# EAGLE board 2VersionsPanelized (EAGLE 6.5.0)
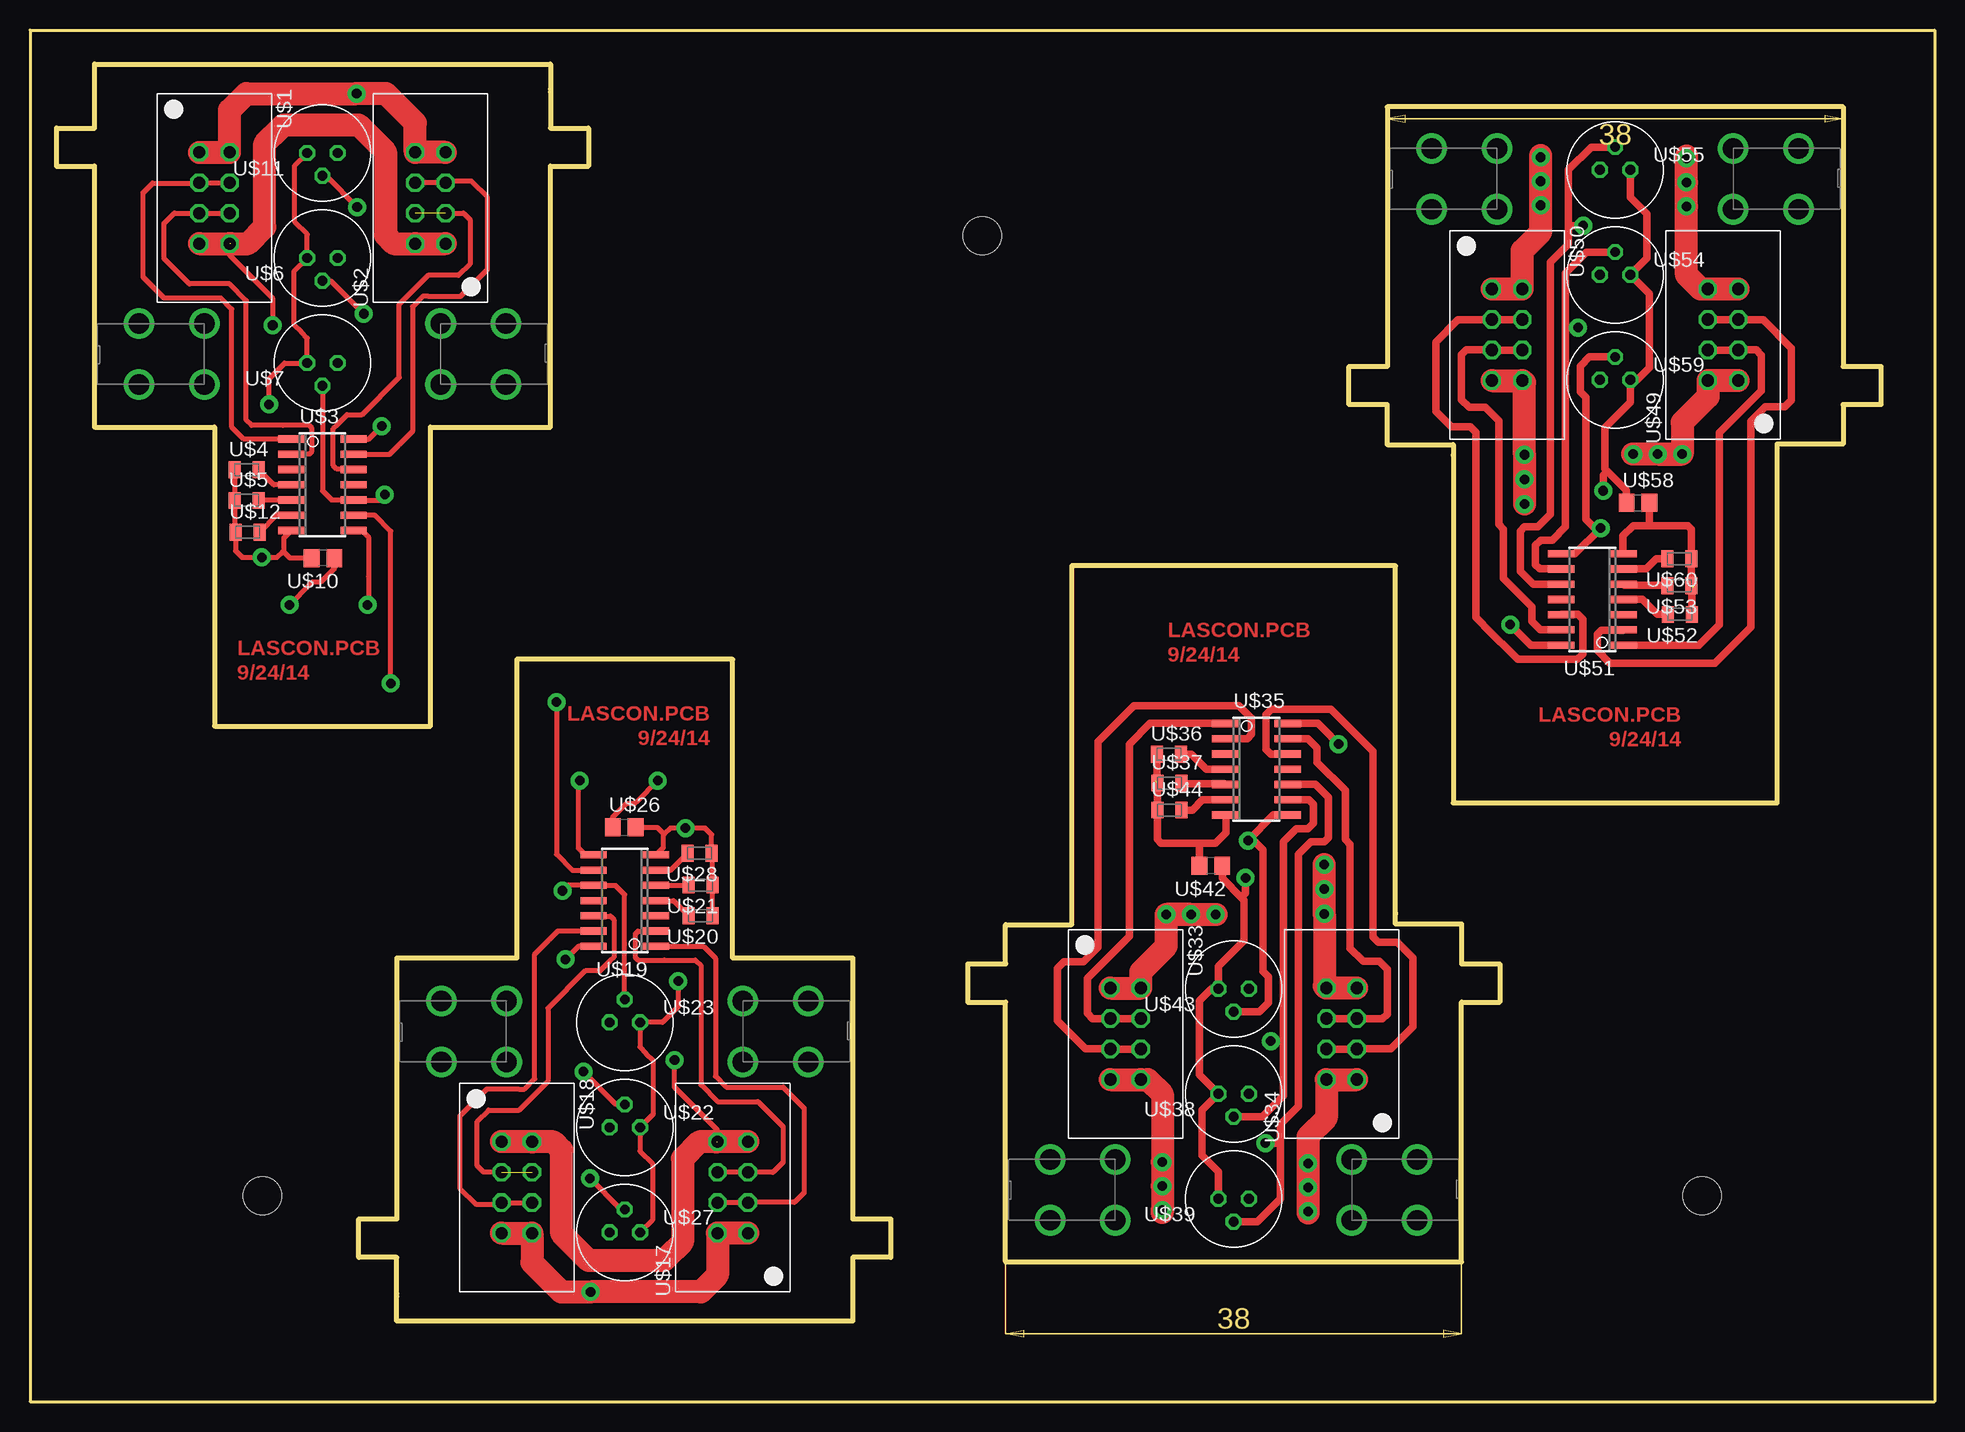
[diagram p0: board, top side]
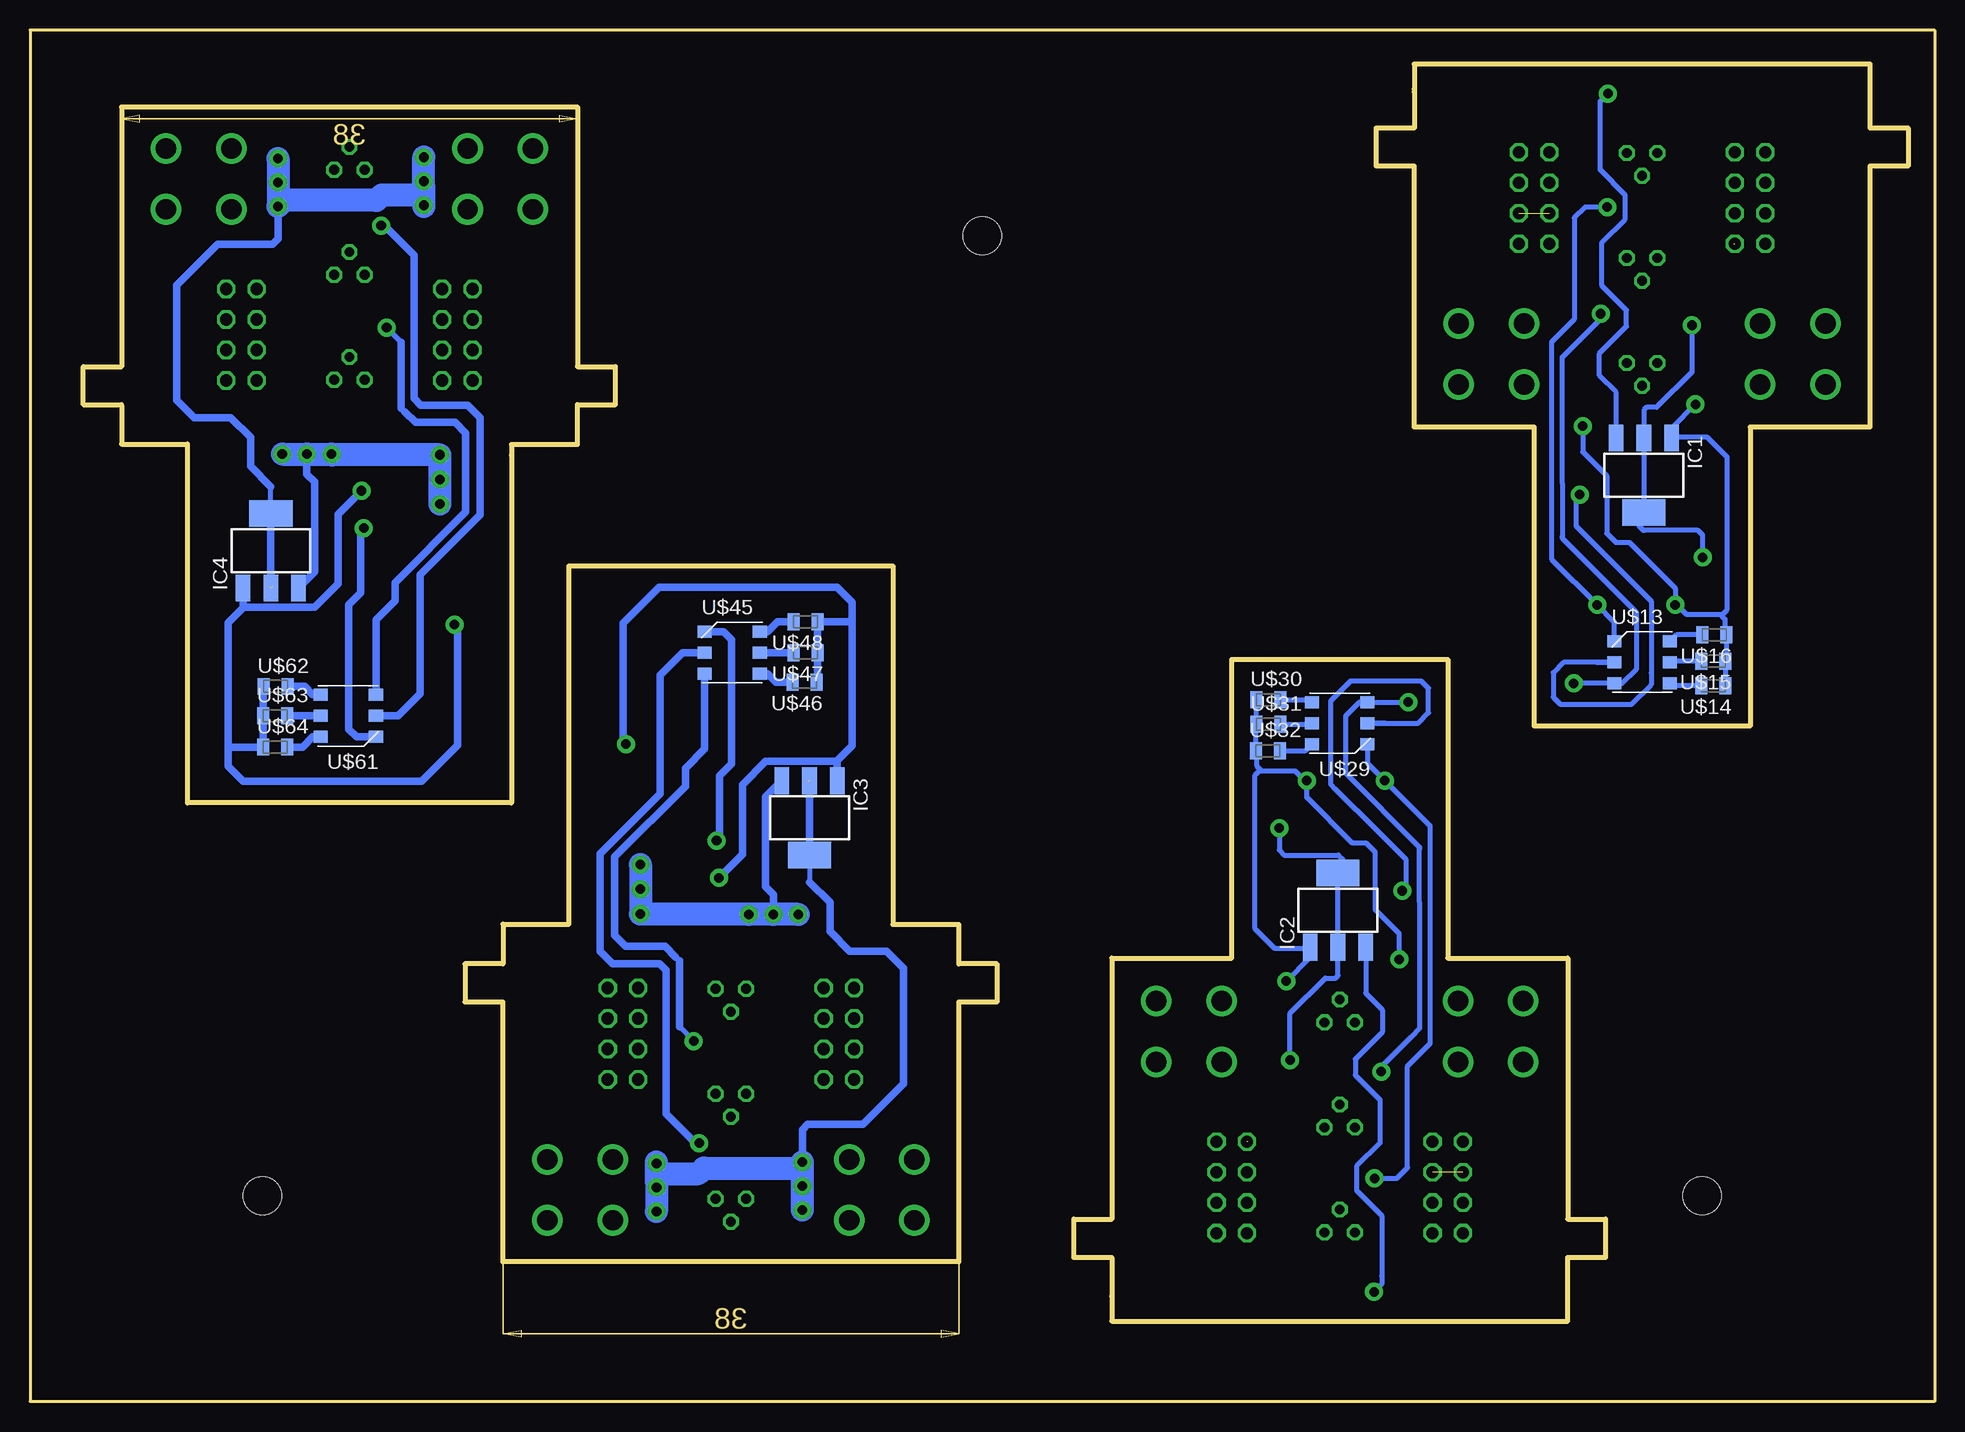
[diagram p1: board, bottom side, seen from below]

Size 158.75 x 114.3 mm. Coordinates in mm from the lower left corner, seen from the top.
Outline: 0,114.3 158.75,114.3 158.75,0 0,0 0,114.3
Copper layers (1*16): Top 0.0356mm / dielectric 1.5011mm / Bottom 0.0356mm
Design rules "SilverCircuits *": minimum track width 7mil, minimum drill 14mil, track to track 7mil, track to pad 7mil, pad to pad 7mil, via to via 7mil, smd to smd 0mil, copper to edge 20mil, drill to drill 8mil, minimum pad ring 10mil, minimum via ring 8mil, stop-mask expansion 4mil, vias tented up to drill 0mil, thermal gap 10mil
Holes 3.17 mm at 79.38,97.15 139.38,17.15 19.38,17.15
Milling: 74 lines

## Footprints (pad centres in the part's own frame; a part is rotated, then mirrored left to right if it is on the bottom)
SOT223 = smd 1.219 x 2.235: 1 -2.311,-3.099; 2 0,-3.099; 3 2.311,-3.099 | smd 3.6 x 2.2: 4 0,3.099
2X04 = drill 1.016 octagon: 1 -3.81,-1.27; 2 -3.81,1.27; 3 -1.27,-1.27; 4 -1.27,1.27; 5 1.27,-1.27; 6 1.27,1.27; 7 3.81,-1.27; 8 3.81,1.27
SO14 = smd 0.6 x 2.2: 1 -3.81,-2.6; 2 -2.54,-2.6; 3 -1.27,-2.6; 4 0,-2.6; 5 1.27,-2.6; 6 2.54,-2.6; 7 3.81,-2.6; 8 3.81,2.6; 9 2.54,2.6; 10 1.27,2.6; 11 0,2.6; 12 -1.27,2.6; 13 -2.54,2.6; 14 -3.81,2.6
RF-C0805 = smd 1 x 1.4: 1 -1,0; 2 1,0
LASER = drill 0.813 octagon: 1 1.27,0; 2 0,1.905; 3 -1.27,0
90DEGMNT = drill 1.7: P$1 -2.72,2.54; P$2 2.72,2.54; P$3 -2.72,-2.54; P$4 2.72,-2.54
C0805 = smd 1.3 x 1.5: 1 -0.95,0; 2 0.95,0
PLCC-6 = smd 1.18 x 1: 1 -2.31,1.75; 2 -2.31,0; 3 -2.31,-1.75; 4 2.31,-1.75; 5 2.31,0; 6 2.31,1.75

## Placement (x,y rotation side)
IC1  [SOT223]  24.23,77.2 180 bottom
IC2  [SOT223]  49.73,40.95 0 bottom
IC3  [SOT223]  93.78,48.65 180 bottom
IC4  [SOT223]  138.68,70.9 0 bottom
U$1  2X4IDC  [2X04]  15.38,100.3 270 top
U$2  2X4IDC  [2X04]  33.38,100.3 90 top
U$3  WS2801  [SO14]  24.38,76.4 270 top
U$4  24  [RF-C0805]  18.08,77.65 0 top
U$5  24  [RF-C0805]  18.08,75.1 0 top
U$6  LASER  [LASER]  24.38,95.3 180 top
U$7  LASER  [LASER]  24.38,86.55 180 top
U$8  90DEGMNT  [90DEGMNT]  11.81,87.3 0 top
U$9  90DEGMNT  [90DEGMNT]  36.95,87.3 180 top
U$10  [C0805]  24.42,70.3 180 top
U$11  LASER  [LASER]  24.38,104.05 180 top
U$12  24  [RF-C0805]  18.12,72.45 0 top
U$13  LED5060A  [PLCC-6]  24.38,61.6 0 bottom
U$14  24  [RF-C0805]  18.42,59.65 180 bottom
U$15  24  [RF-C0805]  18.42,61.7 180 bottom
U$16  24  [RF-C0805]  18.38,63.9 180 bottom
U$17  2X4IDC  [2X04]  58.58,17.85 90 top
U$18  2X4IDC  [2X04]  40.58,17.85 270 top
U$19  WS2801  [SO14]  49.58,41.75 90 top
U$20  24  [RF-C0805]  55.88,40.5 180 top
U$21  24  [RF-C0805]  55.88,43.05 180 top
U$22  LASER  [LASER]  49.58,22.85 0 top
U$23  LASER  [LASER]  49.58,31.6 0 top
U$24  90DEGMNT  [90DEGMNT]  62.14,30.85 180 top
U$25  90DEGMNT  [90DEGMNT]  37.01,30.85 0 top
U$26  [C0805]  49.52,47.85 0 top
U$27  LASER  [LASER]  49.58,14.1 0 top
U$28  24  [RF-C0805]  55.83,45.7 180 top
U$29  LED5060A  [PLCC-6]  49.58,56.55 180 bottom
U$30  24  [RF-C0805]  55.52,58.5 0 bottom
U$31  24  [RF-C0805]  55.52,56.45 0 bottom
U$32  24  [RF-C0805]  55.58,54.25 0 bottom
U$33  2X4IDC  [2X04]  91.33,30.65 270 top
U$34  2X4IDC  [2X04]  109.33,30.65 90 top
U$35  WS2801  [SO14]  102.22,52.7 270 top
U$36  24  [RF-C0805]  94.92,53.95 0 top
U$37  24  [RF-C0805]  94.97,51.55 0 top
U$38  LASER  [LASER]  100.33,25.65 180 top
U$39  LASER  [LASER]  100.33,16.9 180 top
U$40  90DEGMNT  [90DEGMNT]  87.75,17.65 0 top
U$41  90DEGMNT  [90DEGMNT]  112.9,17.65 180 top
U$42  [C0805]  98.42,44.65 180 top
U$43  LASER  [LASER]  100.33,34.4 180 top
U$44  24  [RF-C0805]  94.97,49.3 0 top
U$45  LED5060A  [PLCC-6]  100.22,62.4 0 bottom
U$46  24  [RF-C0805]  94.17,59.95 180 bottom
U$47  24  [RF-C0805]  94.12,62.4 180 bottom
U$48  24  [RF-C0805]  94.12,65 180 bottom
U$49  2X4IDC  [2X04]  141.12,88.9 90 top
U$50  2X4IDC  [2X04]  123.12,88.9 270 top
U$51  WS2801  [SO14]  130.22,66.85 90 top
U$52  24  [RF-C0805]  137.53,65.6 180 top
U$53  24  [RF-C0805]  137.47,68 180 top
U$54  LASER  [LASER]  132.12,93.9 0 top
U$55  LASER  [LASER]  132.12,102.65 0 top
U$56  90DEGMNT  [90DEGMNT]  144.69,101.9 180 top
U$57  90DEGMNT  [90DEGMNT]  119.56,101.9 0 top
U$58  [C0805]  134.03,74.9 0 top
U$59  LASER  [LASER]  132.12,85.15 0 top
U$60  24  [RF-C0805]  137.47,70.25 180 top
U$61  LED5060A  [PLCC-6]  132.22,57.15 180 bottom
U$62  24  [RF-C0805]  138.28,59.6 0 bottom
U$63  24  [RF-C0805]  138.32,57.15 0 bottom
U$64  24  [RF-C0805]  138.32,54.55 0 bottom

## Library data of the parts
IC1-IC4 = microchip; MPN: MCP1804T-3302I
U$1 U$2 U$17 U$18 U$33 U$34 U$49 U$50 = GW-devices; MPN: 75869-132LF
U$3-U$12 U$14-U$16 U$19-U$28 U$30-U$32 U$35-U$44 U$46-U$48 U$51-U$60 U$62-U$64 = GW-devices
U$13 U$29 U$45 U$61 = GW-devices; PRICE: 0.25

## Nets
+3V1: IC2.1 U$19.14 U$22.1 U$23.1 U$26.1 U$27.1 U$30.1 U$31.1 U$32.1
+3V2: IC3.1 U$35.14 U$38.1 U$39.1 U$42.1 U$43.1 U$46.1 U$47.1 U$48.1
+3V3: IC1.1 U$3.14 U$6.1 U$7.1 U$10.1 U$11.1 U$14.1 U$15.1 U$16.1
+3V4: IC4.1 U$51.14 U$54.1 U$55.1 U$58.1 U$59.1 U$62.1 U$63.1 U$64.1
GND: IC1.2 IC1.4 U$1.7 U$1.8 U$2.1 U$2.2 U$3.7 U$4.1 U$5.1 U$10.2 U$12.1
GND1: IC2.2 IC2.4 U$17.7 U$17.8 U$18.1 U$18.2 U$19.7 U$20.1 U$21.1 U$26.2 U$28.1
GND2: IC3.2 IC3.4 U$33.7 U$33.8 U$34.1 U$34.2 U$35.7 U$36.1 U$37.1 U$42.2 U$44.1
GND3: IC4.2 IC4.4 U$49.7 U$49.8 U$50.1 U$50.2 U$51.7 U$52.1 U$53.1 U$58.2 U$60.1
N$1: IC1.3 U$1.1 U$1.2 U$2.7 U$2.8
N$2: U$3.9 U$6.2 U$13.3
N$3: U$3.10 U$7.2 U$13.2
N$4: U$3.8 U$11.2 U$13.1
N$5: U$1.3 U$1.4 U$3.1
N$6: U$1.5 U$1.6 U$3.2
N$7: U$2.5 U$2.6 U$3.13
N$8: U$2.3 U$2.4 U$3.12
N$9: U$3.4 U$4.2
N$10: U$3.5 U$5.2
N$11: U$3.6 U$12.2
N$12: U$13.4 U$14.2
N$13: U$13.5 U$15.2
N$14: U$13.6 U$16.2
N$15: IC2.3 U$17.1 U$17.2 U$18.7 U$18.8
N$16: U$17.3 U$17.4 U$19.1
N$17: U$17.5 U$17.6 U$19.2
N$18: U$18.5 U$18.6 U$19.13
N$19: U$18.3 U$18.4 U$19.12
N$20: U$19.4 U$20.2
N$21: U$19.5 U$21.2
N$22: U$19.10 U$23.2 U$29.2
N$23: U$19.9 U$22.2 U$29.3
N$24: U$19.8 U$27.2 U$29.1
N$25: U$19.6 U$28.2
N$26: U$29.4 U$30.2
N$27: U$29.5 U$31.2
N$28: U$29.6 U$32.2
N$29: IC3.3 U$33.1 U$33.2 U$34.7 U$34.8
N$30: U$33.3 U$33.4 U$35.1
N$31: U$33.5 U$33.6 U$35.2
N$32: U$34.5 U$34.6 U$35.13
N$33: U$34.3 U$34.4 U$35.12
N$34: U$35.4 U$36.2
N$35: U$35.5 U$37.2
N$36: U$35.10 U$39.2 U$45.2
N$37: U$35.9 U$38.2 U$45.3
N$38: U$35.8 U$43.2 U$45.1
N$39: U$35.6 U$44.2
N$40: U$45.4 U$46.2
N$41: U$45.5 U$47.2
N$42: U$45.6 U$48.2
N$43: IC4.3 U$49.1 U$49.2 U$50.7 U$50.8
N$44: U$49.3 U$49.4 U$51.1
N$45: U$49.5 U$49.6 U$51.2
N$46: U$50.5 U$50.6 U$51.13
N$47: U$50.3 U$50.4 U$51.12
N$48: U$51.4 U$52.2
N$49: U$51.5 U$53.2
N$50: U$51.10 U$55.2 U$61.2
N$51: U$51.9 U$54.2 U$61.3
N$52: U$51.8 U$59.2 U$61.1
N$53: U$51.6 U$60.2
N$54: U$61.4 U$62.2
N$55: U$61.5 U$63.2
N$56: U$61.6 U$64.2

## Tracks (layer width: path | path; a pad name or v marks a point on that pad's centre or on a via)
+3V1  (via drill 0.8 pad 1.5)
  Top 0.406: U$27.1 51.88,15.13 51.88,19.85 50.84,20.88 U$22.1 51.92,23.93 51.92,28.45 51.33,29.05 50.84,29.53 U$23.1 52.73,31.6 54.02,32.9 v54.02,35.05 | v52.33,51.75 50.62,50.05 50.42,49.85 49.73,49.85 48.58,48.7 U$26.1 | U$19.14 45.72,37.94 v44.62,36.85
  Bottom 0.406: U$30.1 U$31.1 56.58,56.4 U$32.1 56.48,54.15 56.48,52.95 56.17,52.65 | 56.17,52.65 56.08,52.55 53.27,52.55 52.48,51.75 v52.33,51.75 52.33,50.35 48.52,46.55 47.48,46.55 47.38,46.55 47.33,46.5 46.62,45.8 46.62,41 44.62,39 v44.62,36.85 | 56.17,52.65 56.67,52.15 56.67,39.45 55.02,37.8 52.09,37.8 | 52.09,37.8 IC2.1 | 52.09,37.8 52.09,36.99 v54.02,35.05
+3V2  (via drill 0.8 pad 1.5)
  Top 0.406: 101.17,41.75 101.17,41.8
  Top 0.61: U$39.1 99.06,19.17 97.67,20.55 97.67,24.27 U$38.1 97.47,27.23 97.47,33.4 98.47,34.4 U$43.1 99.06,36.28 101.17,38.4 101.17,41.75 | v109.08,54.8 107.86,56.01 107.36,56.51 U$35.14 | 101.17,41.8 100.97,42 | 100.97,42 99.38,43.6 U$42.1 | v101.33,43.65 101.33,42.35 100.97,42
  Bottom 0.406: IC3.1 91.46,53.41 | 93.12,60 U$46.1 | 90.33,65 90.22,64.9 | 97.17,53.35 97.42,53.35
  Bottom 0.61: 91.46,53.41 90.22,54.65 90.22,64.9 90.22,66.6 91.47,67.85 106.33,67.85 109.33,64.85 109.33,55.05 v109.08,54.8 | 93.12,60 U$47.1 U$48.1 90.33,65 | IC3.1 91.46,53.35 92.38,53.35 97.17,53.35 | 97.42,53.35 99.38,51.4 99.38,45.65 99.38,45.6 v101.33,43.65
+3V3  (via drill 0.8 pad 1.5)
  Top 0.406: U$11.1 22.08,103.02 22.08,98.3 23.1,97.27 U$6.1 22.02,94.22 22.02,89.7 22.62,89.1 23.1,88.62 U$7.1 21.23,86.55 19.92,85.25 v19.92,83.1 | v21.62,66.4 23.33,68.1 23.52,68.3 24.23,68.3 25.38,69.45 U$10.1 | U$3.14 28.23,80.21 v29.33,81.3
  Bottom 0.406: U$14.1 U$15.1 17.38,61.75 U$16.1 17.48,64 17.48,65.2 17.77,65.5 | 17.77,65.5 17.88,65.6 20.67,65.6 21.48,66.4 v21.62,66.4 21.62,67.8 25.42,71.6 26.48,71.6 26.58,71.6 26.62,71.65 27.33,72.35 27.33,77.15 29.33,79.15 v29.33,81.3 | 17.77,65.5 17.27,66 17.27,78.7 18.92,80.35 21.86,80.35 | 21.86,80.35 IC1.1 | 21.86,80.35 21.86,81.16 v19.92,83.1
+3V4  (via drill 0.8 pad 1.5)
  Top 0.406: 131.28,77.8 131.28,77.75
  Top 0.61: U$55.1 133.4,100.38 134.78,99 134.78,95.28 U$54.1 134.97,92.32 134.97,86.15 133.97,85.15 U$59.1 133.4,83.27 131.28,81.15 131.28,77.8 | v123.38,64.75 124.59,63.54 125.09,63.04 U$51.14 | 131.28,77.75 131.47,77.55 | 131.47,77.55 133.07,75.95 U$58.1 | v131.12,75.9 131.12,77.2 131.47,77.55
  Bottom 0.406: IC4.1 140.99,66.14 | 139.32,59.55 U$62.1 | 142.12,54.55 142.22,54.65 | 135.28,66.2 135.03,66.2
  Bottom 0.61: 140.99,66.14 142.22,64.9 142.22,54.65 142.22,52.95 140.97,51.7 126.12,51.7 123.12,54.7 123.12,64.5 v123.38,64.75 | 139.32,59.55 U$63.1 U$64.1 142.12,54.55 | IC4.1 140.99,66.2 140.07,66.2 135.28,66.2 | 135.03,66.2 133.07,68.15 133.07,73.9 133.07,73.95 v131.12,75.9
GND  (via drill 0.8 pad 1.5)  (1 unrouted)
  Top 0.406: U$4.1 U$5.1 17.08,72.5 U$12.1 17.12,70.9 17.67,70.35 v19.33,70.35 20.58,70.35 21.1,70.88 | 21.1,70.88 21.17,70.95 21.17,71.99 U$3.7 | U$10.2 21.67,70.3 21.1,70.88 | U$1.8 16.65,95.53 20.23,91.95 v20.23,89.7
  Top 1.93: U$1.7 U$1.8 | 16.73,96.5 18.17,96.5 19.58,97.9 19.58,104.85 20.88,106.15 21.12,106.4 27.38,106.4 29.62,104.15 29.62,97.2 30.33,96.5 U$2.2 U$2.1
  Bottom 0.406: v20.23,89.7 20.23,85.8 23.17,82.85 24.02,82.85 24.23,82.65 IC1.2 IC1.4 24.62,73.7 24.62,72.95 24.27,72.6 24.23,72.6 19.73,72.6 19.33,72.2 v19.33,70.35
GND1  (via drill 0.8 pad 1.5)  (1 unrouted)
  Top 0.406: U$20.1 U$21.1 56.88,45.65 U$28.1 56.83,47.25 56.27,47.8 v54.62,47.8 53.38,47.8 52.85,47.27 | 52.85,47.27 52.77,47.2 52.77,46.16 U$19.7 | U$26.2 52.27,47.85 52.85,47.27 | U$17.8 57.3,22.62 53.73,26.2 v53.73,28.45
  Top 1.93: U$17.7 U$17.8 | 57.22,21.65 55.77,21.65 54.38,20.25 54.38,13.3 53.08,12 52.83,11.75 46.58,11.75 44.33,14 44.33,20.95 43.62,21.65 U$18.2 U$18.1
  Bottom 0.406: v53.73,28.45 53.73,32.35 50.77,35.3 49.92,35.3 49.73,35.5 IC2.2 IC2.4 49.33,44.45 49.33,45.2 49.67,45.55 49.73,45.55 54.23,45.55 54.62,45.95 v54.62,47.8
GND2  (via drill 0.8 pad 1.5)  (1 unrouted)
  Top 0.406: 93.92,51.6 U$37.1
  Top 0.61: U$36.1 93.92,51.6 | U$37.1 U$44.1 93.97,46.85 94.28,46.55 97.47,46.55 | 97.47,46.55 98.83,46.55 99.67,47.4 99.67,48.84 U$35.7 | U$42.2 97.47,46.55
  Top 1.93: U$33.7 U$33.8 93.19,26.84 94.38,25.65 v94.38,19.95 v94.38,17.95 v94.38,15.95 94.38,15.75 | U$34.1 U$34.2 108.06,23.63 106.53,22.1 v106.53,19.85 v106.53,17.85 v106.53,15.85 106.53,15.7
  Bottom 0.406: IC3.4 93.78,43.3
  Bottom 0.61: IC3.2 IC3.4 | 93.78,43.3 92.08,41.6 92.08,39.2 90.42,37.55 87.38,37.55 85.92,36.1 85.92,26.5 89.33,23.1 93.92,23.1 94.38,22.65 v94.38,19.95
  Bottom 1.93: v94.38,15.95 94.38,19.9 | v106.53,15.85 106.53,18.35 106.53,18.7 | 106.53,18.7 106.53,19.95 106.53,18.7 | 106.53,18.7 106.22,19 103.17,19 103.03,19 102.58,19.45 94.88,19.45 v94.38,19.95
GND3  (via drill 0.8 pad 1.5)  (1 unrouted)
  Top 0.406: 138.53,67.95 U$53.1
  Top 0.61: U$52.1 138.53,67.95 | U$53.1 U$60.1 138.47,72.7 138.18,73 134.97,73 | 134.97,73 133.62,73 132.78,72.15 132.78,70.71 U$51.7 | U$58.2 134.97,73
  Top 1.93: U$49.7 U$49.8 139.26,92.71 138.07,93.9 v138.07,99.6 v138.07,101.6 v138.07,103.6 138.07,103.8 | U$50.1 U$50.2 124.4,95.92 125.92,97.45 v125.92,99.7 v125.92,101.7 v125.92,103.7 125.92,103.85
  Bottom 0.406: IC4.4 138.68,76.25
  Bottom 0.61: IC4.2 IC4.4 | 138.68,76.25 140.38,77.95 140.38,80.35 142.03,82 145.07,82 146.53,83.45 146.53,93.05 143.12,96.45 138.53,96.45 138.07,96.9 v138.07,99.6
  Bottom 1.93: v138.07,103.6 138.07,99.65 | v125.92,103.7 125.92,101.2 125.92,100.85 | 125.92,100.85 125.92,99.6 125.92,100.85 | 125.92,100.85 126.22,100.55 129.28,100.55 129.43,100.55 129.88,100.1 137.57,100.1 v138.07,99.6
N$1  (via drill 0.8 pad 1.5)
  Top 0.406: U$2.8
  Top 1.93: U$1.1 U$1.2 16.65,107.62 18.02,109 v27.23,109 27.27,109 29.67,109 32.1,106.57 U$2.8 U$2.7
  Bottom 0.406: IC1.3 26.54,84.11 27.92,85.5 27.92,87.35 25.67,89.6 25.67,90.95 27.73,93 27.73,96.6 25.77,98.55 25.77,100.55 27.88,102.65 27.88,107.7 27.88,108.35 v27.23,109
N$2  (via drill 0.8 pad 1.5)
  Top 0.406: v30.08,59.85 30.08,72.55 28.77,73.85 U$3.9 | U$6.2 25.08,93.39 v27.83,90.65
  Bottom 0.406: v30.08,59.85 U$13.3 26.02,59.85 24.88,61 24.88,65.8 31.02,71.95 31.02,72.1 31.02,76.55 31.02,87.05 30.33,87.75 27.83,90.25 v27.83,90.65
N$3  (via drill 0.8 pad 1.5)
  Top 0.406: v29.58,75.58 29.12,75.13 U$3.10 26.95,75.15 25.12,75.15 24.38,75.9 U$7.2
  Bottom 0.406: 28.17,61.6 U$13.2 30.92,61.6 31.77,60.75 31.77,58.7 31.17,58.1 25.27,58.1 23.62,59.75 23.62,60.7 23.62,66.7 24.02,67.1 27.58,70.65 29.88,72.95 29.88,75.28 v29.58,75.58
N$4  (via drill 0.8 pad 1.5)
  Top 0.406: U$3.8 27.69,72.59 28.23,72.05 28.23,68.75 28.23,66.5 v28.12,66.4 | U$11.2 24.68,102.14 v27.27,99.55
  Bottom 0.406: U$13.1 26.67,64.95 v28.12,66.4 31.92,70.2 31.92,70.6 31.92,76.95 31.92,77.15 31.92,88.3 30.02,90.2 30.02,98.65 29.12,99.55 v27.27,99.55
N$5
  Top 0.406: U$3.1 20.02,80.21 17.81,80.21 16.83,81.2 16.83,91.05 15.92,91.95 11.17,91.95 9.42,93.7 9.42,100.75 10.22,101.55 14.08,101.55 U$1.3 U$1.4
N$6
  Top 0.406: U$1.6 U$1.5 14.08,99.05 12.03,99.05 11.17,98.2 11.17,95.25 13.28,93.15 16.62,93.15 18.02,91.75 18.02,81.8 18.48,81.35 21.08,81.35 23.27,81.35 23.48,81.15 23.48,79.15 23.27,78.95 U$3.2
N$7
  Top 0.406: U$3.13 29.97,78.94 30.73,79.7 31.88,80.85 31.88,91.25 32.73,92.1 33.23,92.1 35.88,92.1 38.12,94.35 38.12,100.35 36.77,101.7 34.77,101.7 U$2.5 U$2.6
N$8  (1 unrouted)
  Top 0.406: U$2.3 36.15,99.03 36.67,98.5 36.67,94.8 35.73,93.85 33.17,93.85 30.77,91.45 30.77,85.35 27.67,82.25 26.42,82.25 25.62,81.45 25.27,81.1 25.27,78 25.58,77.7 26.95,77.7 U$3.12
N$9
  Top 0.406: U$3.4 20.33,76.4 U$4.2
N$10
  Top 0.406: U$3.5 19.1,75.13 U$5.2
N$11
  Top 0.406: U$3.6 20.53,73.86 U$12.2
N$12
  Bottom 0.406: U$14.2 21.87,59.65 U$13.4
N$13
  Bottom 0.406: U$15.2 21.97,61.7 U$13.5
N$14
  Bottom 0.406: U$16.2 21.52,63.9 U$13.6
N$15  (via drill 0.8 pad 1.5)
  Top 0.406: U$18.8
  Top 1.93: U$17.1 U$17.2 57.3,10.53 55.92,9.15 v46.73,9.15 46.67,9.15 44.27,9.15 41.84,11.58 U$18.8 U$18.7
  Bottom 0.406: IC2.3 47.41,34.04 46.02,32.65 46.02,30.8 48.27,28.55 48.27,27.2 46.23,25.15 46.23,21.55 48.17,19.6 48.17,17.6 46.08,15.5 46.08,10.45 46.08,9.8 v46.73,9.15
N$16
  Top 0.406: U$19.1 53.94,37.94 56.14,37.94 57.12,36.95 57.12,27.1 58.02,26.2 62.77,26.2 64.53,24.45 64.53,17.4 63.73,16.6 59.86,16.6 U$17.3 U$17.4
N$17
  Top 0.406: U$17.6 U$17.5 59.86,19.1 61.92,19.1 62.77,19.95 62.77,22.9 60.67,25 57.33,25 55.92,26.4 55.92,36.35 55.48,36.8 52.88,36.8 50.67,36.8 50.48,37 50.48,39 50.67,39.2 U$19.2
N$18
  Top 0.406: U$19.13 43.98,39.21 43.23,38.45 42.08,37.3 42.08,26.9 41.23,26.05 40.73,26.05 38.08,26.05 35.83,23.8 35.83,17.8 37.17,16.45 39.17,16.45 U$18.5 U$18.6
N$19  (1 unrouted)
  Top 0.406: U$18.3 37.8,19.12 37.27,19.65 37.27,23.35 38.23,24.3 40.77,24.3 43.17,26.7 43.17,32.8 46.27,35.9 47.52,35.9 48.33,36.7 48.67,37.05 48.67,40.15 48.38,40.45 47.01,40.45 U$19.12
N$20
  Top 0.406: U$19.4 53.62,41.75 U$20.2
N$21
  Top 0.406: U$19.5 54.84,43.02 U$21.2
N$22  (via drill 0.8 pad 1.5)
  Top 0.406: v44.38,42.57 44.83,43.02 U$19.10 46.99,43 48.83,43 49.58,42.25 U$23.2
  Bottom 0.406: 45.77,56.55 U$29.2 43.02,56.55 42.17,57.4 42.17,59.45 42.77,60.05 48.67,60.05 50.33,58.4 50.33,57.45 50.33,51.45 49.92,51.05 46.38,47.5 44.08,45.2 44.08,42.87 v44.38,42.57
N$23  (via drill 0.8 pad 1.5)
  Top 0.406: v43.88,58.3 43.88,45.6 45.17,44.3 U$19.9 | U$22.2 48.87,24.75 v46.12,27.5
  Bottom 0.406: v43.88,58.3 U$29.3 47.92,58.3 49.08,57.15 49.08,52.35 42.92,46.2 42.92,46.05 42.92,41.6 42.92,31.1 43.62,30.4 46.12,27.9 v46.12,27.5
N$24  (via drill 0.8 pad 1.5)
  Top 0.406: U$19.8 46.27,45.56 45.73,46.1 45.73,49.4 45.73,51.65 v45.83,51.75 | U$27.2 49.27,16 v46.67,18.6
  Bottom 0.406: U$29.1 47.27,53.2 v45.83,51.75 42.02,47.95 42.02,47.55 42.02,41.2 42.02,41 42.02,29.85 43.92,27.95 43.92,19.5 44.83,18.6 v46.67,18.6
N$25
  Top 0.406: U$19.6 53.41,44.29 U$28.2
N$26
  Bottom 0.406: U$30.2 52.09,58.5 U$29.4
N$27
  Bottom 0.406: U$31.2 51.98,56.45 U$29.5
N$28
  Bottom 0.406: U$32.2 52.44,54.25 U$29.6
N$29  (via drill 0.8 pad 1.5)
  Top 1.93: U$33.1 U$33.2 92.59,35.77 92.59,35.82 94.72,37.95 v94.72,40.6 | U$34.7 U$34.8 107.88,34.64 v107.88,40.65 v107.88,42.7 v107.88,44.75 | v96.78,40.6 v94.72,40.6 | v94.72,40.6 98.88,40.6
  Bottom 0.61: v96.78,40.6 96.78,42.25 97.42,42.9 97.42,49.95 97.42,50.41 IC3.3
  Bottom 1.93: v107.88,44.75 v107.88,40.65 98.88,40.65 v98.83,40.6 v96.78,40.6 v94.72,40.6
N$30
  Top 0.406: 90.03,31.9 U$33.3
  Top 0.61: U$33.3 U$33.4 | U$35.1 93.39,56.51 93.34,56.51 91.62,54.8 91.62,39.65 91.62,38.8 88.12,35.3 88.12,32.35 88.58,31.9 90.03,31.9
N$31
  Top 0.406: 90.03,29.4 U$33.5 | 86.22,36.65 86.17,36.65
  Top 0.61: U$33.5 U$33.6 | 90.03,29.4 87.97,29.4 85.62,31.75 85.62,36.1 86.17,36.65 | 86.22,36.65 86.62,36.65 87.83,36.65 89.03,37.85 89.03,55 89.83,55.8 92.03,58 100.78,58 101.83,56.95 101.83,55.6 101.47,55.25 U$35.2
N$32
  Top 0.406: 110.61,31.9 U$34.5
  Top 0.61: U$34.6 U$34.5 | 110.61,31.9 112.72,31.9 113.12,32.3 113.12,36.05 112.47,36.7 111.12,36.7 110.03,37.8 110.03,46.45 109.62,46.85 109.62,50.95 107.28,53.3 107.28,53.75 107.28,54.5 107.03,54.75 106.53,55.24 U$35.13
N$33
  Top 0.406: 110.61,29.4 U$34.3
  Top 0.61: U$34.4 U$34.3 | 110.61,29.4 113.42,29.4 115.28,31.25 115.28,37 113.97,38.3 112.38,38.3 111.92,38.75 111.92,54.2 110.62,55.5 108.97,57.15 108.42,57.7 103.47,57.7 103.03,57.25 103.03,54.35 103.42,53.95 104.81,53.95 U$35.12
N$34
  Top 0.61: U$36.2 96.83,53.95 98.08,52.7 U$35.4
N$35
  Top 0.406: 96.03,51.5 U$37.2
  Top 0.61: 96.03,51.5 99.56,51.5 U$35.5
N$36  (via drill 0.8 pad 1.5)
  Top 0.406: U$39.2 | 104.22,16.95 104.22,16.9
  Top 0.61: 104.22,21.55 104.22,23.1 105.72,24.6 105.72,24.85 105.72,41.8 105.72,44.9 105.72,45.6 106.78,46.65 107.88,46.65 108.22,47 108.22,50.35 107.12,51.45 104.84,51.45 U$35.10 | 104.22,21.55 104.22,16.95 | U$39.2 102.33,15 104.22,16.9 | v102.97,21.55 104.22,21.55
  Bottom 0.406: 103.28,21.55 v102.97,21.55
  Bottom 0.61: U$45.2 104.38,62.4 106.22,60.55 106.22,50.65 110.17,46.7 111.22,45.65 111.22,37.55 110.17,36.5 106.28,36.5 105.72,35.95 105.72,24 103.28,21.55
N$37  (via drill 0.8 pad 1.5)
  Top 0.406: 104.47,30.05 104.47,29.75 | U$38.2
  Top 0.61: 104.47,30.05 104.47,42.35 104.47,43.3 104.47,46.65 105.58,47.75 106.53,47.75 106.97,48.2 106.97,49.8 106.61,50.16 U$35.9 | U$38.2 102.72,23.75 104.47,25.5 104.47,25.55 104.47,29.75 104.47,30.05 | v103.42,30.05 104.47,30.05
  Bottom 0.406: 104.62,31.25 v103.42,30.05 | 104.92,37.05 104.62,36.75
  Bottom 0.61: 104.62,31.25 104.62,36.05 104.62,36.75 | U$45.3 102.53,54.39 104.12,52.8 104.12,51.3 110.03,45.4 110.03,38.85 109.12,37.95 105.83,37.95 104.92,37.05
N$38  (via drill 0.8 pad 1.5)
  Top 0.61: U$43.2 102.47,32.49 103.22,33.25 103.22,33.55 103.22,35.4 102.78,35.85 102.78,46 102.03,46.75 v101.53,46.75 103.66,48.89 U$35.8
  Bottom 0.406: 101.47,46.8 v101.53,46.75
  Bottom 0.61: U$45.1 100.92,64.15 100.28,63.5 100.28,53.6 100.28,53.15 101.28,52.15 101.28,47 v101.53,46.75
N$39
  Top 0.61: U$44.2 96.88,49.3 97.72,50.15 U$35.6
N$40
  Bottom 0.61: U$45.4 97.28,60.65 96.58,59.95 U$46.2
N$41
  Bottom 0.61: U$45.5 U$47.2
N$42
  Bottom 0.61: U$45.6 97.28,64.15 96.42,65 U$48.2
N$43  (via drill 0.8 pad 1.5)
  Top 1.93: U$49.1 U$49.2 139.85,83.78 139.85,83.73 137.72,81.6 v137.72,78.95 | U$50.7 U$50.8 124.58,84.91 v124.58,78.9 v124.58,76.85 v124.58,74.8 | v135.68,78.95 v137.72,78.95 | v137.72,78.95 133.57,78.95
  Bottom 0.61: v135.68,78.95 135.68,77.3 135.03,76.65 135.03,69.6 135.03,69.14 IC4.3
  Bottom 1.93: v124.58,74.8 v124.58,78.9 133.57,78.9 v133.62,78.95 v135.68,78.95 v137.72,78.95
N$44
  Top 0.406: 142.41,87.65 U$49.3
  Top 0.61: U$49.3 U$49.4 | U$51.1 139.06,63.04 139.12,63.04 140.82,64.75 140.82,79.9 140.82,80.75 144.32,84.25 144.32,87.2 143.88,87.65 142.41,87.65
N$45
  Top 0.406: 142.41,90.15 U$49.5 | 146.22,82.9 146.28,82.9
  Top 0.61: U$49.5 U$49.6 | 142.41,90.15 144.47,90.15 146.82,87.8 146.82,83.45 146.28,82.9 | 146.22,82.9 145.82,82.9 144.62,82.9 143.43,81.7 143.43,64.55 142.62,63.75 140.43,61.55 131.68,61.55 130.62,62.6 130.62,63.95 130.97,64.3 U$51.2
N$46
  Top 0.406: 121.84,87.65 U$50.5
  Top 0.61: U$50.6 U$50.5 | 121.84,87.65 119.72,87.65 119.33,87.25 119.33,83.5 119.97,82.85 121.33,82.85 122.42,81.75 122.42,73.1 122.83,72.7 122.83,68.6 125.17,66.25 125.17,65.8 125.17,65.05 125.42,64.8 125.91,64.31 U$51.13
N$47
  Top 0.406: 121.84,90.15 U$50.3
  Top 0.61: U$50.4 U$50.3 | 121.84,90.15 119.03,90.15 117.17,88.3 117.17,82.55 118.47,81.25 120.08,81.25 120.53,80.8 120.53,65.35 121.83,64.05 123.47,62.4 124.03,61.85 128.97,61.85 129.43,62.3 129.43,65.2 129.03,65.6 127.65,65.6 U$51.12
N$48
  Top 0.61: U$52.2 135.62,65.6 134.38,66.85 U$51.4
N$49
  Top 0.406: 136.43,68.05 U$53.2
  Top 0.61: 136.43,68.05 132.9,68.05 U$51.5
N$50  (via drill 0.8 pad 1.5)
  Top 0.406: U$55.2 | 128.22,102.6 128.22,102.65
  Top 0.61: 128.22,98 128.22,96.45 126.72,94.95 126.72,94.7 126.72,77.75 126.72,74.65 126.72,73.95 125.67,72.9 124.58,72.9 124.22,72.55 124.22,69.2 125.33,68.1 127.6,68.1 U$51.10 | 128.22,98 128.22,102.6 | U$55.2 130.12,104.55 128.22,102.65 | v129.47,98 128.22,98
  Bottom 0.406: 129.18,98 v129.47,98
  Bottom 0.61: U$61.2 128.07,57.15 126.22,59 126.22,68.9 122.28,72.85 121.22,73.9 121.22,82 122.28,83.05 126.17,83.05 126.72,83.6 126.72,95.55 129.18,98
N$51  (via drill 0.8 pad 1.5)
  Top 0.406: 127.97,89.5 127.97,89.8 | U$54.2
  Top 0.61: 127.97,89.5 127.97,77.2 127.97,76.25 127.97,72.9 126.88,71.8 125.92,71.8 125.47,71.35 125.47,69.75 125.84,69.39 U$51.9 | U$54.2 129.72,95.8 127.97,94.05 127.97,94 127.97,89.8 127.97,89.5 | v129.03,89.5 127.97,89.5
  Bottom 0.406: 127.83,88.3 v129.03,89.5 | 127.53,82.5 127.83,82.8
  Bottom 0.61: 127.83,88.3 127.83,83.5 127.83,82.8 | U$61.3 129.91,65.16 128.32,66.75 128.32,68.25 122.42,74.15 122.42,80.7 123.33,81.6 126.62,81.6 127.53,82.5
N$52  (via drill 0.8 pad 1.5)
  Top 0.61: U$59.2 129.98,87.06 129.22,86.3 129.22,86 129.22,84.15 129.68,83.7 129.68,73.55 130.43,72.8 v130.93,72.8 128.78,70.66 U$51.8
  Bottom 0.406: 130.97,72.75 v130.93,72.8
  Bottom 0.61: U$61.1 131.53,55.4 132.18,56.05 132.18,65.95 132.18,66.4 131.18,67.4 131.18,72.55 v130.93,72.8
N$53
  Top 0.61: U$60.2 135.57,70.25 134.72,69.4 U$51.6
N$54
  Bottom 0.61: U$61.4 135.18,58.9 135.88,59.6 U$62.2
N$55
  Bottom 0.61: U$61.5 U$63.2
N$56
  Bottom 0.61: U$61.6 135.18,55.4 136.03,54.55 U$64.2

## Text on the board
Top: LASCON.PCB / 9/24/14 | LASCON.PCB / 9/24/14 | LASCON.PCB / 9/24/14 | LASCON.PCB / 9/24/14